# EAGLE board OpenBook PCB 2D (EAGLE 9.7.0)
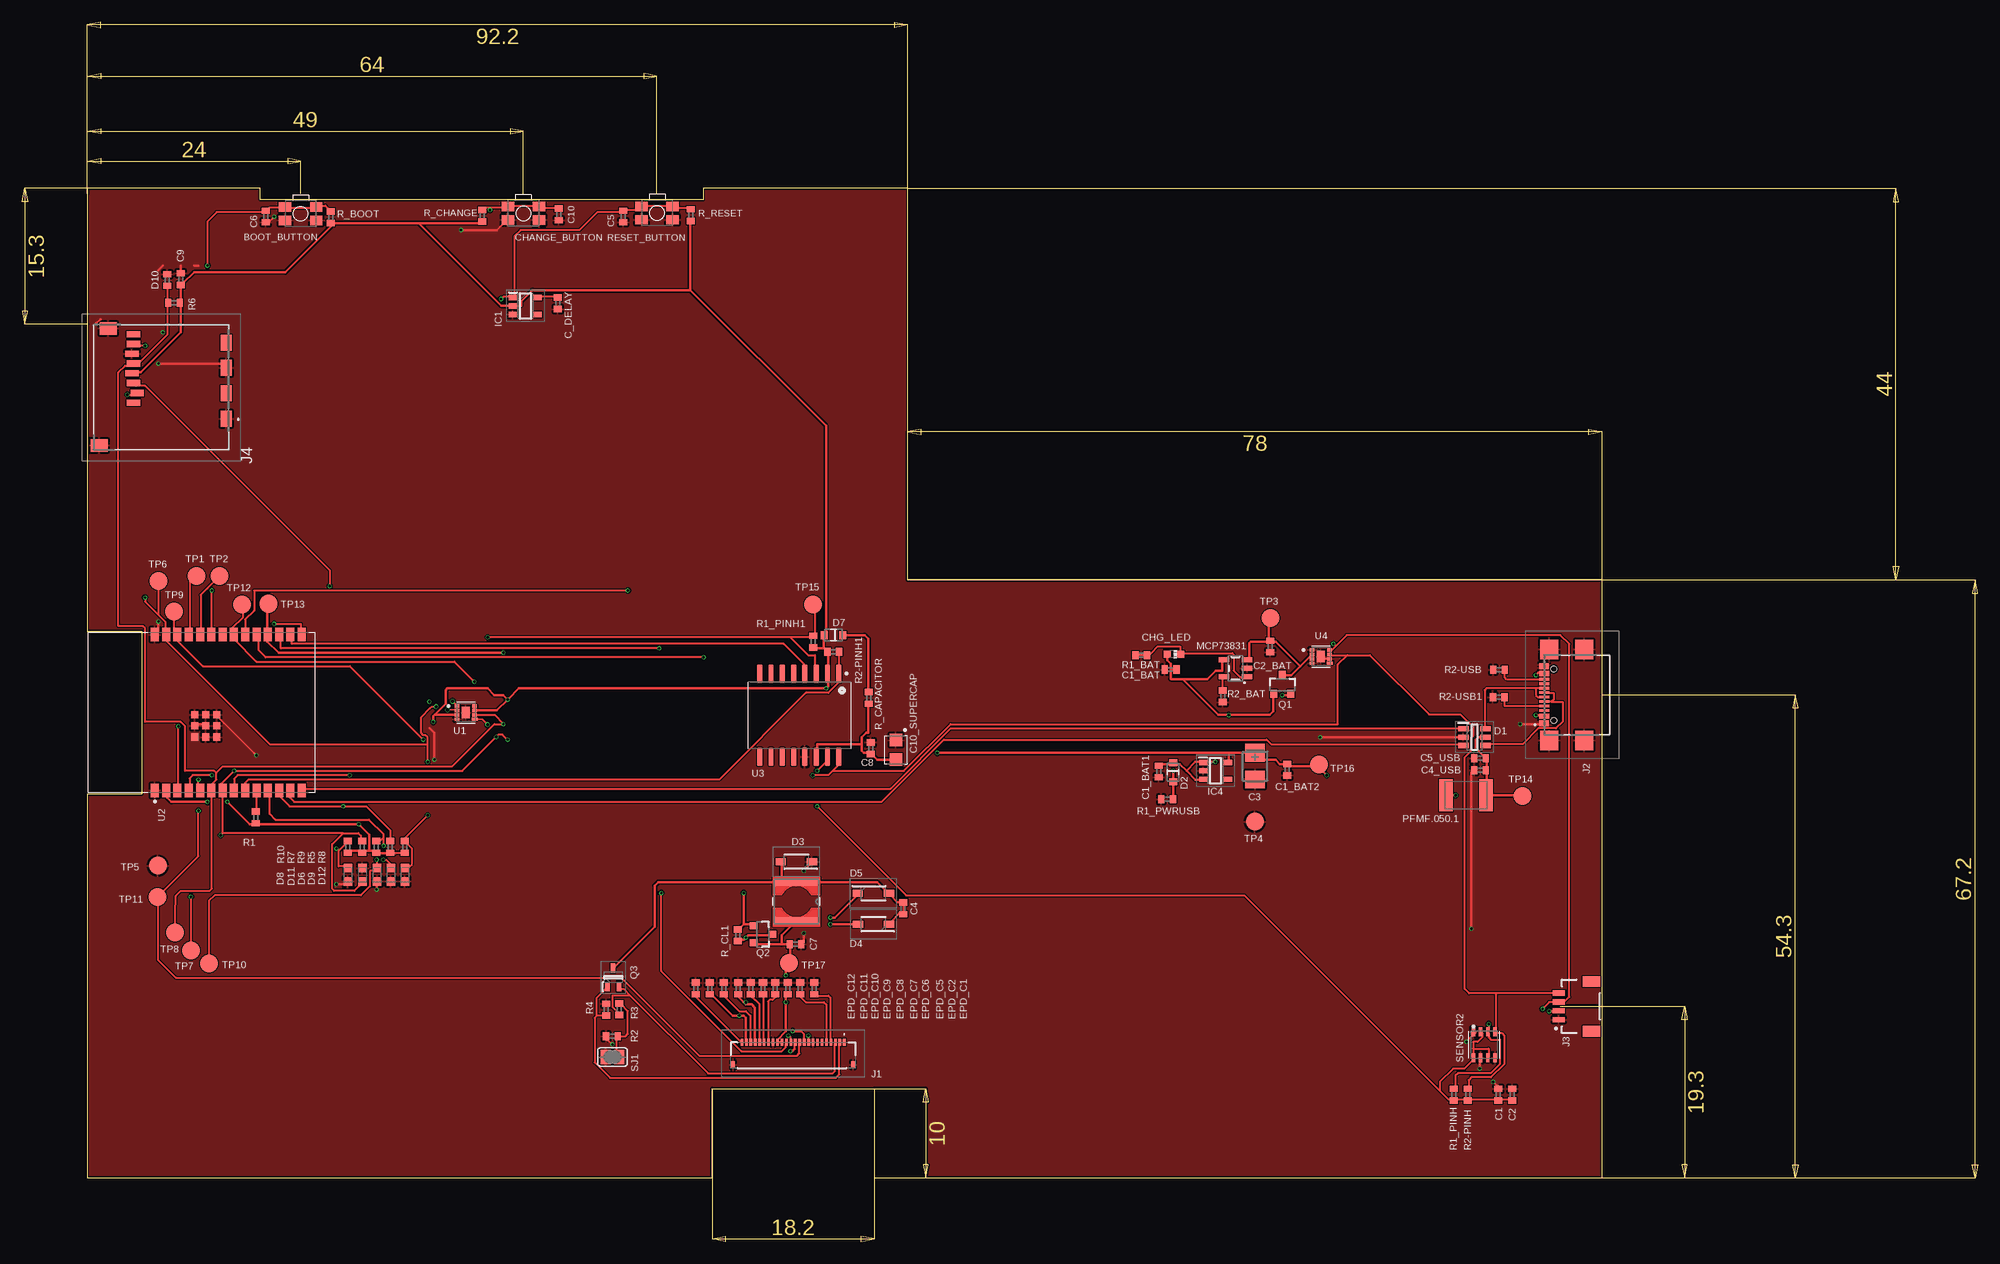
[diagram p0: board, top side]
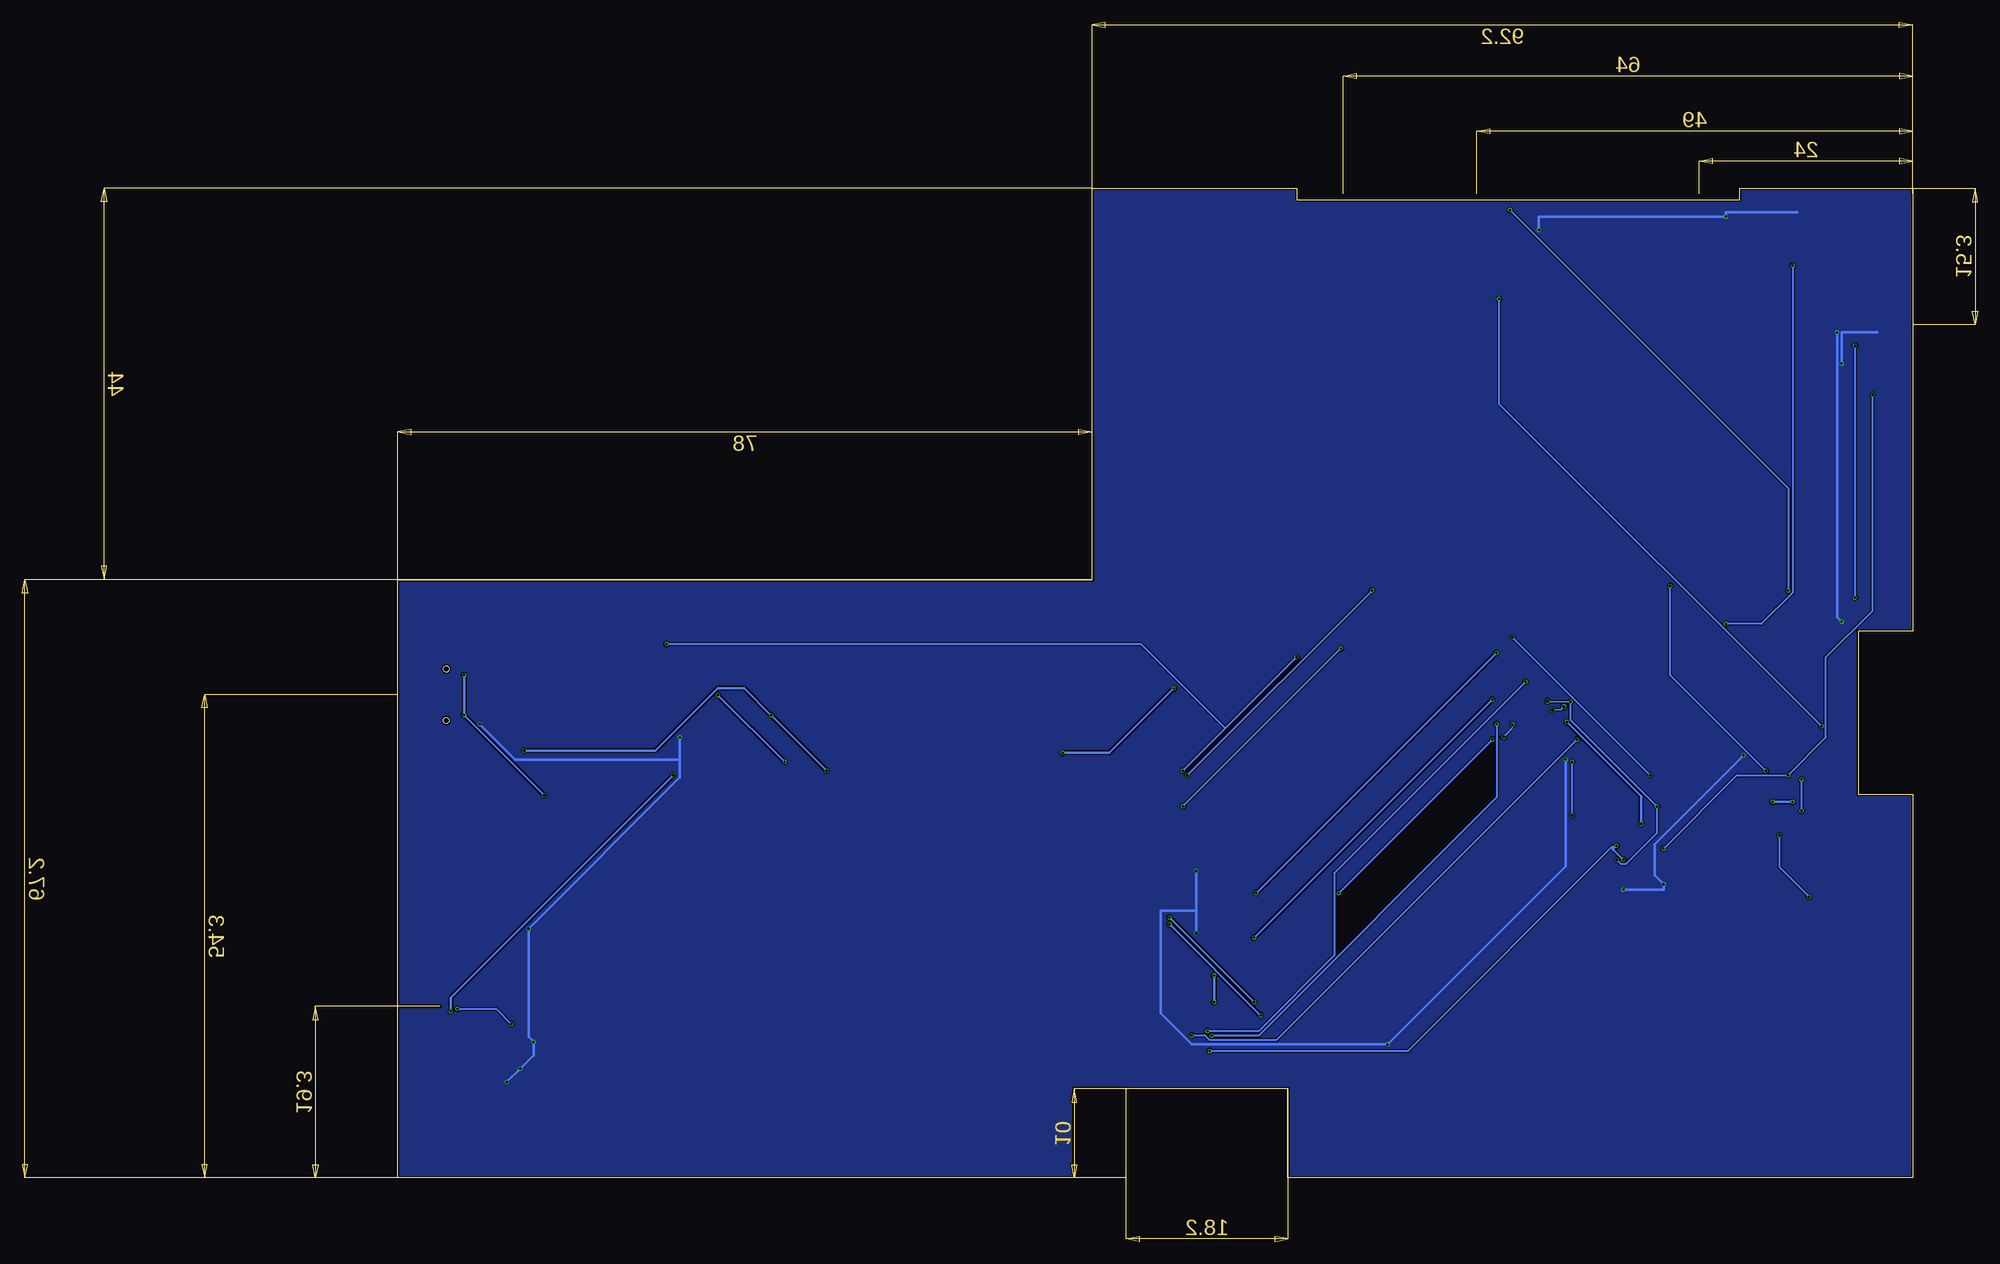
[diagram p1: board, bottom side, seen from below]

Size 170.2 x 111.2 mm. Coordinates in mm from the lower left corner, seen from the top.
Outline: 0,0 70.2,0 70.2,10 88.4,10 88.4,0 170.2,0 170.2,67.2 92.2,67.2 92.2,111.2 69.2,111.2 69.2,109.9 19.45,109.9 19.45,111.2 0,111.2 0,61.45 6.15,61.45 6.15,43.1 0,43.1 0,0
Copper layers (1*16): Top 0.035mm / dielectric 1.6mm / Bottom 0.035mm
Design rules "jlcpcb-2layers": minimum track width 0.15mm, minimum drill 0.3mm, track to track 5mil, track to pad 5mil, pad to pad 5mil, via to via 5mil, smd to smd 5mil, copper to edge 0.2mm, drill to drill 6mil, minimum pad ring 10mil, minimum via ring 3mil, stop-mask expansion 4mil, vias tented up to drill 0mil, thermal gap 10mil
Net classes: 2 POWER: width 0.3 mm

## Footprints (pad centres in the part's own frame; a part is rotated, then mirrored left to right if it is on the bottom)
MYBUTTON = smd 1.4 x 1.05: 1 1.75,0.75; 2 -1.75,0.75; 3 -1.75,-0.75; 4 1.75,-0.75
ESP32_WROVER_EAGLE-LTSPICE_C0402 = smd 0.7 x 0.9: 1 -0.65,0; 2 0.65,0
RCL_CT3528 = smd 2 x 2.2: + -1.5,0; - 1.5,0
CAPCP3225X100N = smd 1.4 x 1.4: 1 -1.1,0; 2 1.1,0
ADAFRUIT_CHIP-LED0603 = smd 0.8 x 0.8: A 0,-0.75; C 0,0.75
SOT95P280X145-6N = smd 1.2 x 0.6: 1 -1.25,0.95; 2 -1.25,0; 3 -1.25,-0.95; 4 1.25,-0.95; 5 1.25,0; 6 1.25,0.95
ESP32_WROVER_AVX---SD0805S020S1R0_AVX_SD0805S020S1R0_0 = smd 0.8 x 0.9: 1 -1.05,0; 2 1.05,0
SOD3716X135N = smd 1.15 x 0.8: 1 -1.75,0; 2 1.75,0
DIOC1608X36N = smd 0.97 x 0.94: 1 -0.75,0; 2 0.75,0
SOT95P280X125-5N = smd 0.9 x 0.6: 1 -1.4,0.95; 2 -1.4,0; 3 -1.4,-0.95; 4 1.4,-0.95; 5 1.4,0.95
SOT95P280X120-5N = smd 0.9 x 0.6: 1 -1.4,0.95; 2 -1.4,0; 3 -1.4,-0.95; 4 1.4,-0.95; 5 1.4,0.95
FH34SRJ24S05SH99 = smd 0.3 x 0.8: 1 5.75,1.45; 2 5.25,1.45; 3 4.75,1.45; 4 4.25,1.45; 5 3.75,1.45; 6 3.25,1.45; 7 2.75,1.45; 8 2.25,1.45; 9 1.75,1.45; 10 1.25,1.45; 11 0.75,1.45; 12 0.25,1.45; 13 -0.25,1.45; 14 -0.75,1.45; 15 -1.25,1.45; 16 -1.75,1.45; 17 -2.25,1.45; 18 -2.75,1.45; 19 -3.25,1.45; 20 -3.75,1.45; 21 -4.25,1.45; 22 -4.75,1.45; 23 -5.25,1.45; 24 -5.75,1.45 | smd 0.4 x 0.8: MP1 6.75,-1.05; MP2 -6.75,-1.05
SAMACSYS_PARTS_USB4110GFA = smd 0.35 x 1.05: A1 -3.35,3.678; A12 3.4,3.678; B1 3.05,3.678; B12 -3.03,3.678 | smd 0.3 x 1.15: A4 -2.55,3.678; A5 -1.25,3.678; A6 -0.25,3.678; A7 0.25,3.678; A8 1.25,3.678; A9 2.55,3.678; B4 2.25,3.678; B5 1.75,3.678; B6 0.75,3.678; B7 -0.75,3.678; B8 -1.75,3.678; B9 -2.25,3.678 | smd 2.18 x 2: MP1 -5.11,-0.827; MP2 5.11,-0.827; MP3 -5.11,3.103; MP4 5.11,3.103 | hole 0.65: -2.89,2.603; 2.89,2.603
JST04_1MM_RA = smd 0.6 x 1.35: 1 -1.5,0; 2 -0.5,0; 3 0.5,0; 4 1.5,0 | smd 1.2 x 2: NC1 2.8,-3.675; NC2 -2.8,-3.675
112ATAARR03ATTEND = smd 1.8 x 1.2: G1 10.6,10.4; G2 4.9,10.4; S1 7.75,10.4; S2 2.05,10.4 | smd 1.4 x 1.9: G3 13.6,-3.85; G4 0.45,-2.85 | smd 0.7 x 1.5: P1 8.8,0; P2 7.7,0.4; P3 6.6,0; P4 5.5,-0.2; P5 4.4,0; P6 3.3,-0.2; P7 2.2,0; P8 1.1,0
IND_4828-WE-TPC_WRE = smd 0.8 x 4.7: 1 -2.159,0; 2 2.159,0
ESP32_WROVER_SPARKFUN-IC-POWER_SOT23-5 = smd 0.55 x 1.2: 1 -0.95,-1.3; 2 0,-1.3; 3 0.95,-1.3; 4 0.95,1.3; 5 -0.95,1.3
ESP32C6_VARISTOR_CT/CN1812 = smd 1.5 x 3.6: 1 -2.25,0; 2 2.25,0
ESP32_WROVER_SPARKFUN-DISCRETESEMI_SOT23-3 = smd 0.8 x 0.9: 1 -0.95,-1; 2 0.95,-1; 3 0,1.1
SOT65P210X110-3N = smd 1.05 x 0.5: 1 -1.05,0.65; 2 -1.05,-0.65; 3 1.05,0
ESP32_WROVER_EAGLE-LTSPICE_R0402 = smd 0.7 x 0.9: 1 -0.65,0; 2 0.65,0
ESP32_WROVER_BME680_PSON80P300X300X100-8N = smd 1.016 x 0.5: 1 1.458,1.2; 2 1.458,0.4; 3 1.458,-0.4; 4 1.458,-1.2; 5 -1.458,-1.22; 6 -1.458,-0.4; 7 -1.458,0.4; 8 -1.458,1.2
SJ = smd 1.168 x 1.6: 1 -0.762,0; 2 0.762,0
TP20R = smd 2 x 2: TP 0,0
SON50P200X200X80-9N = smd 0.6 x 0.35: 1 -0.985,0.75; 2 -0.985,0.25; 3 -0.985,-0.25; 4 -0.985,-0.75; 6 0.985,-0.25; 7 0.985,0.25; 8 0.985,0.75 | smd 0.76 x 0.27: 5 0.985,-0.75 | smd 0.9 x 1.3: 9 0,0
ESP32-C6-WROOM-1-N8 = smd 1.5 x 0.9: 1 -8.75,5.26; 2 -8.75,3.99; 3 -8.75,2.72; 4 -8.75,1.45; 5 -8.75,0.18; 6 -8.75,-1.09; 7 -8.75,-2.36; 8 -8.75,-3.63; 9 -8.75,-4.9; 10 -8.75,-6.17; 11 -8.75,-7.44; 12 -8.75,-8.71; 13 -8.75,-9.98; 14 -8.75,-11.25; 15 8.75,-11.25; 16 8.75,-9.98; 17 8.75,-8.71; 18 8.75,-7.44; 19 8.75,-6.17; 20 8.75,-4.9; 21 8.75,-3.63; 22 8.75,-2.36; 23 8.75,-1.09; 24 8.75,0.18; 25 8.75,1.45; 26 8.75,2.72; 27 8.75,3.99; 28 8.75,5.26 | smd 0.8 x 0.8: 29_1 -2.755,0.79; 29_2 -1.505,0.79; 29_3 -0.255,0.79; 29_4 -2.755,-0.46; 29_5 -1.505,-0.46; 29_6 -0.255,-0.46; 29_7 -2.755,-1.71; 29_8 -1.505,-1.71; 29_9 -0.255,-1.71
SOIC127P1032X265-16N = smd 2.05 x 0.59: 1 -4.655,4.445; 2 -4.655,3.175; 3 -4.655,1.905; 4 -4.655,0.635; 5 -4.655,-0.635; 6 -4.655,-1.905; 7 -4.655,-3.175; 8 -4.655,-4.445; 9 4.655,-4.445; 10 4.655,-3.175; 11 4.655,-1.905; 12 4.655,-0.635; 13 4.655,0.635; 14 4.655,1.905; 15 4.655,3.175; 16 4.655,4.445

## Placement (x,y rotation side)
BOOT_BUTTON  BUTTON_CUSYOMV1  [MYBUTTON]  23.98,108.33 180 top
C1  100nF  [ESP32_WROVER_EAGLE-LTSPICE_C0402]  158.51,9.36 90 top
C1_BAT  4.7uF  [ESP32_WROVER_EAGLE-LTSPICE_C0402]  121.71,57.12 180 top
C1_BAT1  4.7uF  [ESP32_WROVER_EAGLE-LTSPICE_C0402]  120.4,45.67 270 top
C1_BAT2  4.7uF  [ESP32_WROVER_EAGLE-LTSPICE_C0402]  134.79,45.87 270 top
C2  100nF  [ESP32_WROVER_EAGLE-LTSPICE_C0402]  160.09,9.36 90 top
C2_BAT  4.7uF  [ESP32_WROVER_EAGLE-LTSPICE_C0402]  132.91,59.7 270 top
C3  100uF TANT  [RCL_CT3528]  131.21,46.27 270 top
C4  4.7uF/25V  [ESP32_WROVER_EAGLE-LTSPICE_C0402]  91.7,30.29 270 top
C4_USB  100nF  [ESP32_WROVER_EAGLE-LTSPICE_C0402]  156.48,45.82 180 top
C5  1uF  [ESP32_WROVER_EAGLE-LTSPICE_C0402]  60.22,108.02 270 top
C5_USB  4.7uF  [ESP32_WROVER_EAGLE-LTSPICE_C0402]  156.48,47.15 180 top
C6  100nF  [ESP32_WROVER_EAGLE-LTSPICE_C0402]  20.07,108.03 270 top
C7  10uF  [ESP32_WROVER_EAGLE-LTSPICE_C0402]  79.56,26.26 0 top
C8  100nF  [ESP32_WROVER_EAGLE-LTSPICE_C0402]  88.01,48.28 90 top
C9  100nF  [ESP32_WROVER_EAGLE-LTSPICE_C0402]  10.53,100.98 90 top
C10  100nF  [ESP32_WROVER_EAGLE-LTSPICE_C0402]  52.96,108.26 270 top
C10_SUPERCAP  CPH3225A  [CAPCP3225X100N]  90.86,48.09 270 top
C_DELAY  100nF  [ESP32_WROVER_EAGLE-LTSPICE_C0402]  52.85,98.27 270 top
CHANGE_BUTTON  BUTTON_CUSYOMV1  [MYBUTTON]  49.01,108.38 180 top
CHG_LED  [ADAFRUIT_CHIP-LED0603]  122.08,58.84 270 top
D1  USBLC6-2SC6Y  [SOT95P280X145-6N]  155.85,49.52 0 top
D2  ESP32_WROVER_AVX---SD0805S020S1R0_AVX_SD0805S020S1R0_0_0AVX_SD0805S020S1R0_0_0  [ESP32_WROVER_AVX---SD0805S020S1R0_AVX_SD0805S020S1R0_0]  121.99,45.58 270 top
D3  MBR0530  [SOD3716X135N]  79.67,35.53 180 top
D4  MBR0530  [SOD3716X135N]  88.33,28.52 180 top
D5  MBR0530  [SOD3716X135N]  88.31,31.98 0 top
D6  PGB1010603MR  [DIOC1608X36N]  32.56,34.07 90 top
D7  ESP32_WROVER_AVX---SD0805S020S1R0_AVX_SD0805S020S1R0_0_0AVX_SD0805S020S1R0_0_0  [ESP32_WROVER_AVX---SD0805S020S1R0_AVX_SD0805S020S1R0_0]  83.84,60.98 180 top
D8  PGB1010603MR  [DIOC1608X36N]  29.29,34.07 90 top
D9  PGB1010603MR  [DIOC1608X36N]  34.13,34.07 90 top
D10  [ESP32_WROVER_EAGLE-LTSPICE_C0402]  8.99,100.88 270 top
D11  PGB1010603MR  [DIOC1608X36N]  30.92,34.07 270 top
D12  PGB1010603MR  [DIOC1608X36N]  35.69,34.07 90 top
EPD_C1  1uF/50V  [ESP32_WROVER_EAGLE-LTSPICE_C0402]  81.69,21.3 90 top
EPD_C2  1uF/50V  [ESP32_WROVER_EAGLE-LTSPICE_C0402]  80.11,21.3 270 top
EPD_C5  0.1uF/50V  [ESP32_WROVER_EAGLE-LTSPICE_C0402]  78.72,21.3 90 top
EPD_C6  1uF/50V  [ESP32_WROVER_EAGLE-LTSPICE_C0402]  77.32,21.3 90 top
EPD_C7  1uF/50V  [ESP32_WROVER_EAGLE-LTSPICE_C0402]  75.92,21.3 90 top
EPD_C8  1uF/50V  [ESP32_WROVER_EAGLE-LTSPICE_C0402]  74.52,21.3 90 top
EPD_C9  1uF/50V  [ESP32_WROVER_EAGLE-LTSPICE_C0402]  73.11,21.3 90 top
EPD_C10  1uF/50V  [ESP32_WROVER_EAGLE-LTSPICE_C0402]  71.53,21.3 90 top
EPD_C11  1uF/50V  [ESP32_WROVER_EAGLE-LTSPICE_C0402]  69.96,21.3 90 top
EPD_C12  1uF/50V  [ESP32_WROVER_EAGLE-LTSPICE_C0402]  68.38,21.3 90 top
IC1  BD5229G-TR  [SOT95P280X125-5N]  49.23,97.97 0 top
IC4  XC6220A331MR-G  [SOT95P280X120-5N]  126.76,45.74 0 top
J1  FH34SRJ-24S-0.5SH_99_  [FH34SRJ24S05SH99]  79.3,13.79 0 top
J2  SAMACSYS_PARTS_USB4110-GF-A  [SAMACSYS_PARTS_USB4110GFA]  167.36,54.28 90 top
J3  QWIIC_RIGHT_ANGLE  [JST04_1MM_RA]  165.32,19.28 90 top
J4  112A-TAAR-R03_ATTEND112ATA  [112ATAARR03ATTEND]  5.22,95.9 270 top
L1  68uH  [IND_4828-WE-TPC_WRE]  79.67,31.05 270 top
MCP73831  ESP32_WROVER_SPARKFUN-IC-POWER_MCP73831  [ESP32_WROVER_SPARKFUN-IC-POWER_SOT23-5]  129,57.25 90 top
PFMF.050.1  ESP32C6_VARISTOR  [ESP32C6_VARISTOR_CT/CN1812]  154.89,43 0 top
Q1  20V/4.2A/52mΩ/1.4W  [ESP32_WROVER_SPARKFUN-DISCRETESEMI_SOT23-3]  134.26,55.41 0 top
Q2  20V/4.2A/52mΩ/1.4W  [ESP32_WROVER_SPARKFUN-DISCRETESEMI_SOT23-3]  75.88,27.37 270 top
Q3  SI1308EDL-T1-GE3  [SOT65P210X110-3N]  59.09,22.53 90 top
R1  10K  [ESP32_WROVER_EAGLE-LTSPICE_R0402]  18.93,40.51 270 top
R1_BAT  200  [ESP32_WROVER_EAGLE-LTSPICE_R0402]  118.42,58.74 180 top
R1_PINH  10K  [ESP32_WROVER_EAGLE-LTSPICE_R0402]  153.51,9.36 270 top
R1_PINH1  10K  [ESP32_WROVER_EAGLE-LTSPICE_R0402]  81.56,60.26 270 top
R1_PWRUSB  100K  [ESP32_WROVER_EAGLE-LTSPICE_R0402]  121.32,42.54 0 top
R2  2.2  [ESP32_WROVER_EAGLE-LTSPICE_R0402]  58.94,15.91 0 top
R2-PINH  10K  [ESP32_WROVER_EAGLE-LTSPICE_R0402]  155.09,9.36 270 top
R2-PINH1  10K  [ESP32_WROVER_EAGLE-LTSPICE_R0402]  83.82,59.13 180 top
R2-USB  5k1  [ESP32_WROVER_EAGLE-LTSPICE_R0402]  158.6,57.08 180 top
R2-USB1  5k1  [ESP32_WROVER_EAGLE-LTSPICE_R0402]  158.57,54.02 0 top
R2_BAT  2K  [ESP32_WROVER_EAGLE-LTSPICE_R0402]  127.56,54.12 90 top
R3  0.47  [ESP32_WROVER_EAGLE-LTSPICE_R0402]  59.79,18.96 270 top
R4  10K  [ESP32_WROVER_EAGLE-LTSPICE_R0402]  58.3,18.91 270 top
R5  10K  [ESP32_WROVER_EAGLE-LTSPICE_R0402]  34.06,37.2 270 top
R6  10K  [ESP32_WROVER_EAGLE-LTSPICE_R0402]  9.74,98.33 0 top
R7  10K  [ESP32_WROVER_EAGLE-LTSPICE_R0402]  30.88,37.2 270 top
R8  10K  [ESP32_WROVER_EAGLE-LTSPICE_R0402]  35.65,37.2 270 top
R9  10K  [ESP32_WROVER_EAGLE-LTSPICE_R0402]  32.47,37.2 270 top
R10  10K  [ESP32_WROVER_EAGLE-LTSPICE_R0402]  29.29,37.2 270 top
R_BOOT  10K  [ESP32_WROVER_EAGLE-LTSPICE_C0402]  27.38,107.92 270 top
R_CAPACITOR  15  [ESP32_WROVER_EAGLE-LTSPICE_R0402]  87.81,53.94 90 top
R_CHANGE  10K  [ESP32_WROVER_EAGLE-LTSPICE_R0402]  44.39,108.11 270 top
R_CL1  10K  [ESP32_WROVER_EAGLE-LTSPICE_R0402]  73.08,27.27 270 top
R_RESET  10K  [ESP32_WROVER_EAGLE-LTSPICE_R0402]  67.78,108.17 270 top
RESET_BUTTON  BUTTON_CUSYOMV1  [MYBUTTON]  64.03,108.41 180 top
SENSOR2  ESP32_WROVER_BME680_BME680  [ESP32_WROVER_BME680_PSON80P300X300X100-8N]  156.94,14.96 90 top
SJ1  [SJ]  59.01,13.59 0 top
TP1  TPTP20R  [TP20R]  12.27,67.61 0 top
TP2  TPTP20R  [TP20R]  14.88,67.61 0 top
TP3  TPTP20R  [TP20R]  132.94,62.89 0 top
TP4  TPTP20R  [TP20R]  131.17,40.04 0 top
TP5  TPTP20R  [TP20R]  7.94,35.09 0 top
TP6  TPTP20R  [TP20R]  8.01,67.06 0 top
TP7  TPTP20R  [TP20R]  11.64,25.57 0 top
TP8  TPTP20R  [TP20R]  9.84,27.57 0 top
TP9  TPTP20R  [TP20R]  9.77,63.66 0 top
TP10  TPTP20R  [TP20R]  13.69,24.1 0 top
TP11  TPTP20R  [TP20R]  7.89,31.56 0 top
TP12  TPTP20R  [TP20R]  17.38,64.41 0 top
TP13  TPTP20R  [TP20R]  20.34,64.51 0 top
TP14  TPTP20R  [TP20R]  161.24,42.94 0 top
TP15  TPTP20R  [TP20R]  81.55,64.42 0 top
TP16  TPTP20R  [TP20R]  138.39,46.47 0 top
TP17  TPTP20R  [TP20R]  78.84,24.15 0 top
U1  W25Q512JVEIQ  [SON50P200X200X80-9N]  42.54,52.28 0 top
U2  ESP32-C6-WROOM-1-N8  [ESP32-C6-WROOM-1-N8]  12.85,52.29 90 top
U3  DS3231SN#  [SOIC127P1032X265-16N]  79.99,51.97 270 top
U4  MAX17048G+T10  [SON50P200X200X80-9N]  138.6,58.57 0 top

## Library data of the parts
BOOT_BUTTON CHANGE_BUTTON CHG_LED J2 J4 PFMF.050.1 RESET_BUTTON SJ1 TP1-TP17 U2 = DeskAssistant v19 v1
C1 C1_BAT C1_BAT1 C1_BAT2 C2 C2_BAT C4 C4_USB C5 C5_USB C6-C10 C_DELAY D10 EPD_C1 EPD_C2 EPD_C5-EPD_C12 R_BOOT = DeskAssistant v19 v1; SPICEMODEL: NONE; SPICEPREFIX: C
C3 = DeskAssistant v19 v1; SPICEPREFIX: C
C10_SUPERCAP = DeskAssistant v19 v1; AVAILABILITY: Not in stock; CHECK_PRICES: https://www.snapeda.com/parts/CPH3225A/Seiko+Instruments/view-part/?ref=eda; DESCRIPTION: 11 mF (EDLC) Supercapacitor 3.3 V 1210 (3225 Metric) - -; MF: Seiko Instruments; MP: CPH3225A; PACKAGE: 1210 Seiko; PRICE: None; PURCHASE-URL: https://www.snapeda.com/api/url_track_click_mouser/?unipart_id=562593&manufacturer=Seiko Instruments&part_name=CPH3225A&search_term=None; SNAPEDA_LINK: https://www.snapeda.com/parts/CPH3225A/Seiko+Instruments/view-part/?ref=snap
D1 = DeskAssistant v19 v1; AVAILABILITY: In Stock; CHECK_PRICES: https://www.snapeda.com/parts/USBLC6-2SC6Y/STMicroelectronics/view-part/?ref=eda; DESCRIPTION: 17V Clamp 5A (8/20µs) Ipp Tvs Diode Surface Mount SOT-23-6; MF: STMicroelectronics; MP: USBLC6-2SC6Y; PACKAGE: SOT-23-6 STMicroelectronics; PRICE: None; SNAPEDA_LINK: https://www.snapeda.com/parts/USBLC6-2SC6Y/STMicroelectronics/view-part/?ref=snap
D2 D7 = DeskAssistant v19 v1; CENTROID_NOT_SPECIFIED: No; DATASHEET: http://datasheets.avx.com/schottky.pdf; DIGIKEY_DESCRIPTION: DIODE SCHOTTKY 20V 1A 0805; DIGIKEY_PART_NUMBER: 478-7800-1-ND; LEAD_FREE: yes; MF: AVX; MOUSER_PART_NUMBER: 581-SD0805S020S1R0; PACKAGE: 0805 (2012 metric); PREFIX: D; ROHS: yes; TEMPERATURE_RANGE_HIGH: +125°C; TEMPERATURE_RANGE_LOW: -55°C
D3-D5 = DeskAssistant v19 v1; AVAILABILITY: In Stock; CHECK_PRICES: https://www.snapeda.com/parts/MBR0530/Onsemi/view-part/?ref=eda; DESCRIPTION: Diode Schottky 30 V 500mA Surface Mount SOD-123; MF: ON Semiconductor; MP: MBR0530; PACKAGE: SOD-123-2 ON Semiconductor; PRICE: None; PURCHASE-URL: https://www.snapeda.com/api/url_track_click_mouser/?unipart_id=179458&manufacturer=ON Semiconductor&part_name=MBR0530&search_term=None; SNAPEDA_LINK: https://www.snapeda.com/parts/MBR0530/Onsemi/view-part/?ref=snap
D6 D8 D9 D11 D12 = DeskAssistant v19 v1; AVAILABILITY: In Stock; CHECK_PRICES: https://www.snapeda.com/parts/PGB1010603MR/Littelfuse/view-part/?ref=eda; DESCRIPTION: 150V (Typ) Clamp - Ipp Tvs Diode Surface Mount 0603 (1608 Metric); MF: Littelfuse Inc.; MP: PGB1010603MR; PACKAGE: 0603 Littelfuse Inc.; PRICE: None; PURCHASE-URL: https://www.snapeda.com/api/url_track_click_mouser/?unipart_id=5659453&manufacturer=Littelfuse Inc.&part_name=PGB1010603MR&search_term=None; SNAPEDA_LINK: https://www.snapeda.com/parts/PGB1010603MR/Littelfuse/view-part/?ref=snap
IC1 = DeskAssistant v19 v1; DESCRIPTION: Voltage Detector with Adjustable Delay Time: CMOS processes are utilized to develop high precision, low current consumption CMOS reset ICs that allow arbitrary setting of the delay time. The extensive lineup includes both Nch Open Drain and CMOS output types in a wide range of detection voltages (from 2.3V to 6.0V, in 0.1V steps), enabling selection of the ideal solution based on customer requirements. In addition, the entire series is of course both lead-free and RoHS-compliant.; HEIGHT: 1.25mm; MANUFACTURER_NAME: ROHM Semiconductor; MANUFACTURER_PART_NUMBER: BD5229G-TR; MOUSER_PART_NUMBER: 755-BD5229G-TR; MOUSER_PRICE-STOCK: https://www.mouser.co.uk/ProductDetail/ROHM-Semiconductor/BD5229G-TR?qs=4kLU8WoGk0vvnhrrYwdszw%3D%3D
IC4 = DeskAssistant v19 v1; DESCRIPTION: LDO Voltage Regulators; HEIGHT: 1.2mm; MANUFACTURER_NAME: Torex; MANUFACTURER_PART_NUMBER: XC6220A331MR-G; MOUSER_PART_NUMBER: 865-XC6220A331MR-G; MOUSER_PRICE-STOCK: https://www.mouser.co.uk/ProductDetail/Torex-Semiconductor/XC6220A331MR-G?qs=AsjdqWjXhJ8ZSWznL1J0gg%3D%3D
J1 = DeskAssistant v19 v1; DESCRIPTION: 24 Position FFC, FPC Connector Contacts, Top and Bottom 0.020" (0.50mm) Surface Mount, Right Angle; HEIGHT: 1.1mm; MANUFACTURER_NAME: Hirose; MANUFACTURER_PART_NUMBER: FH34SRJ-24S-0.5SH(99); MOUSER_PART_NUMBER: 798-FH34SRJ24S05SH99; MOUSER_PRICE-STOCK: https://www.mouser.co.uk/ProductDetail/Hirose-Connector/FH34SRJ-24S-0.5SH99?qs=vcbW%252B4%252BSTIpKBl5ap9J8Fw%3D%3D
J3 = DeskAssistant v19 v1; PROD_ID: CONN-13694
L1 = DeskAssistant v19 v1; COPYRIGHT: Copyright (C) 2024 Ultra Librarian. All rights reserved.; MANUFACTURER_PART_NUMBER: 744043680; MFR_NAME: Wurth Electronics
MCP73831 = DeskAssistant v19 v1; PROD_ID: IC-09995
Q1 Q2 = DeskAssistant v19 v1; PROD_ID: TRAN-14388
Q3 = DeskAssistant v19 v1; AVAILABILITY: In Stock; CHECK_PRICES: https://www.snapeda.com/parts/SI1308EDL-T1-GE3/Vishay+Siliconix/view-part/?ref=eda; DESCRIPTION: Si1308EDL-T1-GE3 N-channel MOSFET Transistor, 1.5 A, 30 V, 3-Pin SC-70 | Siliconix / Vishay SI1308EDL-T1-GE3; MF: Vishay Siliconix; MP: SI1308EDL-T1-GE3; PACKAGE: SOT-323 Vishay Semiconductor; PRICE: None; PURCHASE-URL: https://www.snapeda.com/api/url_track_click_mouser/?unipart_id=274603&manufacturer=Vishay Siliconix&part_name=SI1308EDL-T1-GE3&search_term=None; SNAPEDA_LINK: https://www.snapeda.com/parts/SI1308EDL-T1-GE3/Vishay+Siliconix/view-part/?ref=snap
R1 R1_BAT R1_PINH R1_PINH1 R1_PWRUSB R2 R2-PINH R2-PINH1 R2-USB R2-USB1 R2_BAT R3-R10 R_CAPACITOR R_CHANGE R_CL1 R_RESET = DeskAssistant v19 v1; SPICEMODEL: NONE; SPICEPREFIX: R
SENSOR2 = DeskAssistant v19 v1; AVAILABILITY: Unavailable; DESCRIPTION: Integrated Environmental Unit; MF: Bosch Sensortec; MP: BME680; PACKAGE: LGA-8 Bosch Tools; PRICE: None
U1 = DeskAssistant v19 v1; AVAILABILITY: In Stock; CHECK_PRICES: https://www.snapeda.com/parts/W25Q512JVEIQ/Winbond+Electronics/view-part/?ref=eda; DESCRIPTION: FLASH - NOR Memory IC 512Mb (64M x 8) SPI - Quad I/O 133 MHz 8-WSON (8x6); MF: Winbond Electronics; MP: W25Q512JVEIQ; PACKAGE: Package; PRICE: None; SNAPEDA_LINK: https://www.snapeda.com/parts/W25Q512JVEIQ/Winbond+Electronics/view-part/?ref=snap
U3 = DeskAssistant v19 v1; AVAILABILITY: In Stock; CHECK_PRICES: https://www.snapeda.com/parts/DS3231SN%23/Analog+Devices/view-part/?ref=eda; DESCRIPTION: Extremely Accurate I²C-Integrated RTC/TCXO/Crystal; MF: Analog Devices; MP: DS3231SN#; PACKAGE: SOIC-16 Maxim; PRICE: None; PURCHASE-URL: https://www.snapeda.com/api/url_track_click_mouser/?unipart_id=99048&manufacturer=Analog Devices&part_name=DS3231SN#&search_term=None; SNAPEDA_LINK: https://www.snapeda.com/parts/DS3231SN%23/Analog+Devices/view-part/?ref=snap
U4 = DeskAssistant v19 v1; AVAILABILITY: In Stock; CHECK_PRICES: https://www.snapeda.com/parts/MAX17048G+T10/Analog+Devices/view-part/?ref=eda; DESCRIPTION: 3µA 1-Cell/2-Cell Fuel Gauge with ModelGauge; MF: Analog Devices; MP: MAX17048G+T10; PACKAGE: TDFN-8 Maxim; PRICE: None; PURCHASE-URL: https://www.snapeda.com/api/url_track_click_mouser/?unipart_id=329239&manufacturer=Analog Devices&part_name=MAX17048G+T10&search_term=None; SNAPEDA_LINK: https://www.snapeda.com/parts/MAX17048G+T10/Analog+Devices/view-part/?ref=snap

## Nets
3V3 [POWER]: C1_BAT2.1 C3.+ C9.1 D7.2 IC1.2 IC4.5 J3.2 J4.P4 Q2.3 R1.2 R1_PINH1.2 R2-PINH1.2 R5.2 R6.2 R7.2 R8.2 R9.2 R10.2 R_BOOT.2 R_CHANGE.2 R_CL1.2 R_RESET.2 TP16.TP U1.3 U1.7 U1.8 U2.2 U3.2
32KHZ: R2-PINH1.1 U2.9 U3.1
A5_J2: J2.A5 R2-USB1.2
B5_J2: J2.B5 R2-USB.1
C_DELAY: C_DELAY.1 IC1.5
CE_VIN [POWER]: C1_BAT1.1 D2.1 IC4.1 IC4.3 Q1.2
CHG_STATUS: CHG_LED.C MCP73831.1 R1_BAT.1 R1_BAT.2
D7_R_CAP [POWER]: D7.1 R_CAPACITOR.2
DN: D1.4 J2.A7 J2.B7
DP: D1.6 J2.A6 J2.B6
EPD_3V3 [POWER]: C7.1 EPD_C5.1 J1.15 J1.16 L1.2 Q2.2 TP17.TP
EPD_3V3_C [POWER]: Q2.1 R_CL1.1 TP13.TP U2.18
EPD_BUSY: J1.9 TP9.TP U2.26
EPD_CS: D6.2 J1.12 R9.1 TP10.TP U2.11
EPD_DC: J1.11 TP11.TP U2.5
EPD_RST: J1.10 TP12.TP U2.21
FLASH_CS: D9.2 R5.1 U1.1 U2.12
GDR: J1.2 Q3.1 R4.2
GND [POWER]: BOOT_BUTTON.1 BOOT_BUTTON.2 C1.2 C1_BAT1.2 C1_BAT2.2 C1_BAT.2 C2.2 C2_BAT.2 C3.- C4_USB.2 C5.2 C5_USB.2 C6.2 C7.2 C8.2 C9.2 C10.2 C10_SUPERCAP.1 C_DELAY.2 CHANGE_BUTTON.1 CHANGE_BUTTON.2 D1.2 D3.1 D6.1 D8.1 D9.1 D10.1 D11.1 D12.1 EPD_C1.2 EPD_C2.1 EPD_C5.2 EPD_C6.2 EPD_C7.2 EPD_C8.2 EPD_C9.2 EPD_C10.2 EPD_C11.2 EPD_C12.2 IC1.3 IC4.2 J1.8 J1.17 J1.MP1 J1.MP2 J2.A1 J2.A12 J2.B1 J2.B12 J2.MP1 J2.MP2 J2.MP3 J2.MP4 J3.1 J4.G1 J4.G2 J4.G3 J4.G4 J4.P6 MCP73831.2 R1_PWRUSB.1 R2-USB1.1 R2-USB.2 R2.1 R2_BAT.1 R4.1 RESET_BUTTON.1 RESET_BUTTON.2 SENSOR2.1 SENSOR2.5 SENSOR2.7 SJ1.1 TP4.TP TP5.TP U1.4 U1.9 U2.1 U2.28 U2.29_1 U2.29_2 U2.29_3 U2.29_4 U2.29_5 U2.29_6 U2.29_7 U2.29_8 U2.29_9 U3.13 U4.1 U4.4 U4.6 U4.9
GPIO8: R1.1 U2.10
I2C_PW: C1.1 C2.1 R1_PINH.2 R2-PINH.2 SENSOR2.2 SENSOR2.6 SENSOR2.8 U2.17
INT_RTC: R1_PINH1.1 TP15.TP U2.8 U3.3
IO/BOOT: BOOT_BUTTON.3 BOOT_BUTTON.4 C6.1 R_BOOT.1 U2.15
IO/CHANGE: C10.1 CHANGE_BUTTON.3 CHANGE_BUTTON.4 R_CHANGE.1 U2.23
MISO: D12.2 J4.P7 R8.1 TP6.TP U1.2 U2.27
MOSI: D11.2 J1.14 J4.P3 R7.1 TP7.TP U1.5 U2.7
N$12: EPD_C1.1 J1.4
N$13: EPD_C2.2 J1.5
N$14: EPD_C6.1 J1.18
N$15: EPD_C7.1 J1.19
N$16: EPD_C8.1 J1.20
N$19: EPD_C10.1 J1.22
N$20: EPD_C12.1 J1.24
PREVGH [POWER]: D5.1 EPD_C9.1 J1.21
PREVGL [POWER]: D4.2 EPD_C11.1 J1.23
PROG: MCP73831.5 R2_BAT.2
RESE: J1.3 Q3.2 R3.2
RESE': R2.2 R3.1 SJ1.2
RESET: C5.1 IC1.1 R_RESET.1 RESET_BUTTON.3 RESET_BUTTON.4 U2.3
RTC_RST: U2.16 U3.4
RX: TP2.TP U2.24
SCK: D10.2 J1.13 J4.P5 R6.1 TP8.TP U1.6 U2.6
SCL: J3.4 R2-PINH.1 SENSOR2.4 U2.20 U3.16 U4.7
SDA: J3.3 R1_PINH.1 SENSOR2.3 U2.19 U3.15 U4.8
SRC [POWER]: C4.1 C4.2 D3.2 D4.1 D5.2 L1.1 Q3.3
SS_SD: D8.2 J4.P2 R10.1 U2.4
TX: TP1.TP U2.25
USB_D+: D1.1 U2.14
USB_D-: D1.3 U2.13
VBAT [POWER]: C2_BAT.1 MCP73831.3 Q1.3 TP3.TP U4.2 U4.3
VBUS [POWER]: C1_BAT.1 C4_USB.1 C5_USB.1 CHG_LED.A D1.5 D2.2 MCP73831.4 PFMF.050.1.2 Q1.1 R1_PWRUSB.2 TP14.TP
VRTC [POWER]: C8.1 C10_SUPERCAP.2 R_CAPACITOR.1 U3.14
VUSB [POWER]: J2.A4 J2.A9 J2.B4 J2.B9 PFMF.050.1.1

## Tracks (layer width: path | path; a pad name or v marks a point on that pad's centre or on a via)
3V3  (via drill 0.3)
  Top 0.3: J4.P4 5.25,90.5 6,90.5 10.5,95 10.5,98.25 R6.2 10.5,98.5 10.5,100.25 C9.1 10.75,100.5 12,101.75 22.25,101.75 27.75,107.25 | 37.25,107.25 44.25,107.25 R_CHANGE.2 | 37.25,107.25 27.75,107.25 | 27.75,107.25 27.5,107.25 R_BOOT.2 27.75,107.25 | 37.25,107.25 46.5,98 47.75,98 IC1.2 48,98 48.75,98 48.75,98.5 50,99.75 67.75,99.75 | 67.75,99.75 67.75,107.5 R_RESET.2 | 128.25,47.75 128.25,46.75 IC4.5 | 128.25,47.75 131,47.75 C3.+ 131.25,47.75 132,47 133.5,47 134,46.5 134.75,46.5 C1_BAT2.1 135,46.5 135.25,46.25 138.25,46.25 | v164.25,18.75 165.25,18.75 J3.2 | 138.25,46.25 v139.25,45.25 | 138.25,46.25 TP16.TP | R8.2 34.58,36.47 R5.2 33.63,36.5 32.54,36.5 R9.2 32.32,36.75 31.7,36.75 | 31.7,36.75 31.7,38.55 v30.5,39.75 19,39.75 R1.2 18.75,39.75 18.25,39.75 v15.75,42.25 | 31.7,36.75 31.06,36.75 R7.2 30.5,36.75 29.59,36.75 R10.2 | v13.5,42.25 9.45,42.25 9,42.7 9,43.5 U2.2 | 82.75,59.5 83,59.25 R2-PINH1.2 83.25,59 83.25,56.75 U3.2 83.25,56.5 83.25,55.25 v83,55 48.5,55 47.37,53.87 v47.25,53.75 | 82.75,59.5 81.75,59.5 R1_PINH1.2 | 82.75,59.5 82.75,60.75 D7.2 83,61 83,84.5 67.75,99.75 | R_CL1.2 73.25,26.75 73.75,26.75 v74,27 74.25,27.25 76.75,27.25 Q2.3 | 39.03,52.03 40.25,53.25 40.25,54.8 40.45,55 45,55 45.75,54.25 46.75,54.25 v47.25,53.75 | v95.5,47.75 128.25,47.75 | U1.8 U1.7 46.03,52.53 v47.25,53.75 | U1.3 39.03,52.03 | 39.03,52.03 38.87,51.87 v38.87,51.23
  Bottom 0.3: v164.25,18.75 164.25,20.25 v139.25,45.25 | v15.75,42.25 v13.5,42.25 | v47.25,53.75 v74,27 | v95.5,47.75 90.25,47.75 v83,55 | v30.5,39.75 30.5,42.86 v38.87,51.23
32KHZ
  Top 0.2: R2-PINH1.1 84.5,59 84.5,56.75 U3.1 84.25,56.5 84.25,55.5 83.25,54.5 80.75,54.5 71,44.75 18.1,44.75 17.75,44.4 U2.9
A5_J2
  Top 0.2: R2-USB1.2 159.25,54 159.25,53 163.5,53 J2.A5
B5_J2
  Top 0.2: R2-USB.1 159.25,56.25 159.5,56 163.5,56 J2.B5
C_DELAY
  Top 0.2: IC1.5 50.75,99 52.75,99 C_DELAY.1
CE_VIN  (via drill 0.3)
  Top 0.3: 123.5,45.75 122.75,46.5 122,46.5 D2.1 121.75,46.5 120.5,46.5 C1_BAT1.1 | 123.5,45.75 124.5,44.75 125.25,44.75 IC4.3 | 123.5,45.75 124.5,46.75 125.25,46.75 IC4.1 125.5,46.75 v126.75,46.75 | v134.25,54.25 135,54.25 Q1.2
  Bottom 0.3: v126.75,46.75 v134.25,54.25
CHG_STATUS
  Top 0.2: R1_BAT.2 117.79,58.71 119.04,58.71 R1_BAT.1 119.29,58.96 119.54,58.96 120.29,59.71 122.79,59.71 122.79,58.96 CHG_LED.C 123.04,58.96 128.64,58.96 128.79,58.81 128.79,57.01 129.54,56.26 130.29,56.26 MCP73831.1
D7_R_CAP
  Top 0.3: R_CAPACITOR.2 87.75,54.75 87.75,60.6 87.35,61 85,61 D7.1
DN
  Top 0.2: 164.5,53.5 163.75,53.5 J2.B7 | 164.5,53.5 164.75,53.75 164.75,54.5 163.75,54.5 J2.A7 | 164.5,53.5 165.75,53.5 165.75,51.25 165,50.5 163,50.5 161.25,48.75 157.25,48.75 D1.4
DP
  Top 0.2: 162.75,55 162.75,54.25 163,54 163.5,54 J2.A6 | 162.75,55 163.5,55 J2.B6 | 162.75,55 157.2,55 157,54.8 157,50.5 D1.6
EPD_3V3  (via drill 0.3)
  Top 0.3: 77.5,15.25 78,15.25 J1.15 | 77.5,15.25 77.5,15.5 78.5,16.5 v78.5,19.75 78.5,20.5 EPD_C5.1 | 77.5,15.25 J1.16 | 78,26.25 78.75,26.25 C7.1 79,26.25 79,24.25 TP17.TP 78.75,24 78.5,24 v78.5,22.75 | 78,26.25 75,26.25 Q2.2 | 78,26.25 78,27.25 79.5,28.75 L1.2
  Bottom 0.3: v78.5,22.75 v78.5,19.75
EPD_3V3_C  (via drill 0.3)
  Top 0.3: 73.75,28.5 73.25,28 R_CL1.1 | 73.75,28.5 74.75,28.5 Q2.1 | TP13.TP 20.25,64.5 20.25,61.25 U2.18 20.25,61 20.25,60.25 21.5,59 v46.75,59 | v73.75,32 73.75,28.5
  Bottom 0.3: v46.75,59 v73.75,32
EPD_BUSY  (via drill 0.3)
  Top 0.2: v81,16 81,15.25 J1.9 | v37.75,49.25 29.5,57.5 13,57.5 10.25,60.25 10.25,61 U2.26 10,61.25 9.75,61.25 9.75,63.5 TP9.TP
  Bottom 0.2: v81,16 79.5,16 79,15.5 71.5,15.5 v37.75,49.25
EPD_CS  (via drill 0.3)
  Top 0.2: v79,14.25 79.25,14.25 79.5,14.5 79.5,15 J1.12 | v32.5,35.75 32.5,34.95 D6.2 32.55,34.8 32.25,34.5 31.75,34.5 31.75,32.75 30.75,31.75 14.3,31.75 13.68,31.12 13.68,24.12 TP10.TP | U2.11 20.5,43.5 20.5,40.9 21.15,40.25 31.65,40.25 33.3,38.6 33.3,38.3 | v33.3,37.3 33.3,38.3 | R9.1 32.85,37.85 33.3,38.3
  Bottom 0.2: v79,14.25 56.75,14.25 33.75,37.25 33.75,37 | v33.3,37.3 33.75,36.85 33.75,37 | 33.75,37 v32.5,35.75
EPD_DC  (via drill 0.3)
  Top 0.2: J1.11 80,15 80,14 79.75,13.75 68.75,13.75 60,22.5 9.95,22.5 7.95,24.5 7.95,31.51 TP11.TP 12.5,36.17 v12.5,41.25 | v12.5,44.75 12.5,43.75 U2.5
  Bottom 0.2: v12.5,41.25 v12.5,44.75
EPD_RST  (via drill 0.3)
  Top 0.2: v79.25,16.5 80.2,16.5 80.5,16.2 80.5,15.25 J1.10 | v43.5,55.75 41.25,58 19,58 16.5,60.5 16.5,61 U2.21 16.25,61.25 16.25,61.75 17.5,63 17.5,64.25 TP12.TP
  Bottom 0.2: v79.25,16.5 73.5,16.5 65,25 65,34.25 v43.5,55.75
FLASH_CS  (via drill 0.3, 0.35)
  Top 0.15: U1.1 v41.03,53.55
  Top 0.2: U2.12 21.75,43.5 21.75,42.75 22.75,41.75 v28.75,41.75 31.35,41.75 34.06,39.04 R5.1 | v33.25,35.75 33.6,35.75 34,35.35 34,35.05 D9.2
  Bottom 0.15: v41.03,53.55 40.98,53.5 v38.45,53.5
  Bottom 0.2: v38.45,53.5 38.45,51.45 v28.75,41.75 28.75,38.75 32.25,35.25 32.75,35.25 v33.25,35.75
GDR
  Top 0.2: 57.25,18.25 57,18 57,13 58.75,11.25 84.1,11.25 84.5,11.65 84.5,15 J1.2 | 57.25,18.25 58.25,18.25 R4.2 | 57.25,18.25 57.25,20.25 58.25,21.25 Q3.1
GND  (via drill 0.3)
  Top 0.3: U2.29_5 13.25,51 12.25,51 U2.29_2 | v156.45,12.29 156.45,13.29 SENSOR2.7 | v157.95,10.79 158.45,10.29 C1.2 | v154.95,15.29 155.95,16.29 SENSOR2.1 | v155.5,28 155.5,45.5 C4_USB.2 | v138.5,49.5 154.5,49.5 D1.2 | v161,51 163.5,51 J2.A1 | v80.5,27.5 80.5,26.5 C7.2 | v80.5,34.5 81.5,35.5 D3.1 | v32.5,32.4 32.5,32.95 D6.1 | v28,33 29.04,33 D8.1 | v19,47.5 14.5,52 U2.29_9 | v8,62.5 8,61.5 U2.28 | 12,102.5 12.5,102.5 | 9,101.5 D10.1 | 10.5,102.5 10.5,101.5 C9.2 | 8,102 8.5,102.5 | 1,96 1.5,96.5 | v21,108 20.5,107.5 C6.2 | v8,91.5 15,91.5 15.5,91 J4.G2 | v42,106.5 46,106.5 47,107.5 CHANGE_BUTTON.1 | v59,15 58.5,15.5 R2.1 | v39,47 39,50 38.5,50.5 | U4.6 138.85,58.32 U4.9
  Bottom 0.3: v157.95,10.79 v156.45,12.29 154.95,13.79 v154.95,15.29 155.5,15.84 v155.5,28 138.5,45 138.5,47 | v138.5,49.5 138.5,47 | 138.5,47 157,47 v161,51 | v80.5,34.5 80.5,30 | 80.5,30 v80.5,27.5 | v32.5,32.4 28,32.4 v28,33 29,34 29,37.5 v19,47.5 | v8,62.5 8.5,63 v8.5,95 | 13,108.5 21,108.5 v21,108 42,108 v42,106.5 | 4,95 8,95 v8,91.5 | 80.5,30 84.5,30 84.5,18.5 81,15 v59,15 39,35 v39,47
  pour Top: -33.77,-27.97 197.72,-27.97 197.72,136.77 -33.77,136.77
  pour Bottom: 172.01,-27.99 172.03,-27.97 197.72,-27.97 197.72,137.32 -34.22,137.32 -34.22,-28.27 171.72,-28.27
GPIO8
  Top 0.2: R1.1 19,41.25 19,43.5 U2.10
I2C_PW  (via drill 0.3)
  Top 0.2: 155.7,14.54 155.7,15.29 156.2,15.29 156.7,15.79 156.7,16.29 SENSOR2.2 | 155.7,14.54 155.7,13.54 SENSOR2.8 155.7,13.29 154.7,12.29 153.45,12.29 151.96,10.79 151.96,9.79 | 155.7,14.54 157.45,14.54 157.45,13.54 SENSOR2.6 | C2.1 159.95,8.79 158.7,8.79 C1.1 158.45,8.79 155.2,8.79 R2-PINH.2 154.95,8.79 153.7,8.79 R1_PINH.2 153.45,8.79 152.95,8.79 151.96,9.79 | v64.25,59.5 21.75,59.5 21.75,61 U2.17 | v82,41.75 92,31.75 129.99,31.75 151.96,9.79
  Bottom 0.2: v82,41.75 v64.25,59.5
INT_RTC  (via drill 0.3)
  Top 0.2: TP15.TP 81.75,64.25 81.75,61 R1_PINH1.1 81.5,60.75 79,60.75 | v29.5,45.25 16.9,45.25 16.5,44.85 16.5,43.75 U2.8 | 79,60.75 v45,60.75 | 79,60.75 81,58.75 81.75,58.75 81.75,56.75 U3.3
  Bottom 0.2: v45,60.75 v29.5,45.25
IO/BOOT  (via drill 0.3)
  Top 0.2: R_BOOT.1 27.25,108.75 26.75,109.25 25.75,109.25 BOOT_BUTTON.3 25.5,109 22.25,109 BOOT_BUTTON.4 22,109 20.5,109 20.25,108.75 C6.1 20,108.5 14.55,108.5 13.5,107.45 v13.5,102.5 | v21,62.25 24,62.25 24,61.25 U2.15
  Bottom 0.2: v21,62.25 17,62.25 13.5,65.75 v13.5,102.5
IO/CHANGE  (via drill 0.3)
  Top 0.2: C10.1 52.75,109 51,109 CHANGE_BUTTON.3 50.75,109.25 47.5,109.25 CHANGE_BUTTON.4 47.25,109 45.25,109 | 45.25,109 44.5,109 R_CHANGE.1 | v14,66 14,61.25 U2.23 | 45.25,109 v45.25,108.75
  Bottom 0.2: v14,66 14,77.5 v45.25,108.75
MISO  (via drill 0.3, 0.35)
  Top 0.15: 38.5,52.75 38.7,52.95 v39.2,52.95 | U1.2 41.51,52.58 v40.47,52.58
  Top 0.2: D12.2 35.74,35 36.25,35 36.5,35.25 36.5,37 R8.1 35.52,38.02 v38.25,40.75 | 38.5,52.75 37.5,51.75 37.5,50 37.75,49.75 38,49.75 38.25,49.5 38.25,48.75 | v38.25,46.75 38.25,48.75 | v6.5,93.5 5.25,93.5 J4.P7 | v6.5,65.2 6.5,64.75 8.01,63.24 | 8.01,63.24 TP6.TP | 8.01,63.24 8.75,62.5 8.75,61.25 U2.27 9,61 9,60.25 20.5,48.75 38.25,48.75
  Bottom 0.15: v40.47,52.58 39.57,52.58 v39.2,52.95
  Bottom 0.2: v38.25,40.75 v38.25,46.75 | v6.5,93.5 v6.5,65.2
MOSI  (via drill 0.3, 0.35)
  Top 0.15: U1.5 44.37,51.53 v44.98,50.92
  Top 0.2: v64.5,32 64.5,23.25 73.5,14.25 78.05,14.25 78.5,14.7 78.5,15 J1.14 | v47.25,49.25 47.2,49.25 46.65,49.8 46.2,49.8 v45.95,49.55 42.15,45.75 v16.5,45.75 15,44.25 15,43.75 U2.7 15.25,43.5 15.25,38.75 | 28.75,38.75 30.45,38.75 30.75,38.45 30.75,37.88 R7.1 | 28.75,38.75 27.5,37.5 27.5,32.5 27.75,32.25 30,32.25 31,33.25 D11.2 | 28.75,38.75 15.25,38.75 | v27.25,66.5 27.25,68.25 6.5,89 5.5,89 5.25,89.25 J4.P3 | 15.25,38.75 v15,38.5 | v11.65,31.6 TP7.TP
  Bottom 0.15: v45.95,49.55 44.98,50.52 v44.98,50.92
  Bottom 0.2: v47.25,49.25 v64.5,32 | v27.25,66.5 27.25,56.5 v16.5,45.75 | v15,38.5 15,34.95 v11.65,31.6
N$12
  Top 0.2: J1.4 83.5,15.25 83.5,20.25 83.25,20.5 81.75,20.5 EPD_C1.1
N$13
  Top 0.2: J1.5 83,15.25 83,19.5 82.75,19.75 80.75,19.75 80,20.5 EPD_C2.2
N$14
  Top 0.2: J1.18 76.5,15.25 76.5,19.85 76.65,20 77,20 77.5,20.5 EPD_C6.1
N$15
  Top 0.2: J1.19 76,15.25 76,20.5 EPD_C7.1
N$16
  Top 0.2: J1.20 75.5,15.25 75.5,19.55 75.05,20 75,20 74.5,20.5 EPD_C8.1
N$19
  Top 0.2: J1.22 74.5,15.25 74.5,18.25 74,18.75 73.25,18.75 71.5,20.5 EPD_C10.1
N$20
  Top 0.2: J1.24 73.5,15.25 68.25,20.5 EPD_C12.1
PREVGH  (via drill 0.3)
  Top 0.3: 73.75,19.75 73,20.5 EPD_C9.1 | 73.75,19.75 74,19.5 74.65,19.5 75,19.15 75,15.25 J1.21 | v83.5,29.25 84,29.25 86.5,31.75 D5.1 | 73.75,19.75 v74,19.75
  Bottom 0.3: v83.5,29.25 v74,19.75
PREVGL  (via drill 0.3)
  Top 0.3: J1.23 74,15.25 74,18 73.75,18.25 v73.25,18.25 72.5,18.25 70.25,20.5 70,20.5 EPD_C11.1 | v83.5,28.5 86.5,28.5 D4.2
  Bottom 0.3: v73.25,18.25 v83.5,28.5
PROG
  Top 0.2: R2_BAT.2 127.54,54.83 127.54,56.26 MCP73831.5
RESE
  Top 0.2: 61,20.5 60.25,21.25 59.75,21.25 Q3.2 | 61,20.5 69.75,11.75 83.75,11.75 84,12 84,15 J1.3 | 61,20.5 59,20.5 59,19.25 59.75,18.5 R3.2
RESE'
  Top 0.2: SJ1.2 59.75,13.75 59.5,13.75 59.5,15.75 R2.2 59.66,15.95 60.5,15.95 60.75,16.2 60.75,18.75 60,19.5 R3.1
RESET  (via drill 0.3)
  Top 0.2: R_RESET.1 67.75,109 66,109 RESET_BUTTON.3 65.75,109.25 62.5,109.25 RESET_BUTTON.4 62.25,109 62,108.75 60.25,108.75 C5.1 60,108.5 57.3,108.5 55.3,106.5 48.7,106.5 48,105.8 48,99 IC1.1 47.75,99 46.75,99 v46.5,98.75 | v10.25,50.75 10.25,43.75 U2.3
  Bottom 0.2: v10.25,50.75 46.5,87 v46.5,98.75
RTC_RST
  Top 0.2: U2.16 23,61 23,60 78.25,60 80.5,57.75 80.5,56.75 U3.4
RX
  Top 0.2: U2.24 12.75,61.25 12.75,65.5 13.5,66.25 14.75,67.5 TP2.TP
SCK  (via drill 0.3)
  Top 0.2: v78.75,16 78.85,16 79,15.85 79,15.25 J1.13 | D10.2 9,100 9,98.5 R6.1 9,98.25 9,94.75 6,91.75 5.5,91.75 5.25,91.5 J4.P5 5,91.5 4.75,91.25 4.25,91.25 3.5,90.5 3.5,62 6.25,62 6.5,61.75 6.5,51.25 10.5,51.25 11,50.75 11,45.75 14.25,45.75 14.5,45.5 | TP8.TP 9.95,31.7 10.51,32.25 13.75,32.25 14,32.5 14,43.5 U2.6 14,43.75 14,44.25 14.5,44.75 14.5,45.5 | 14.5,45.5 15.25,46.25 41,46.25 45.75,51 v46.75,51 46.75,51.04 45.76,52.03 U1.6
  Bottom 0.2: v78.75,16 73.5,16 46.75,42.75 v46.75,51
SCL  (via drill 0.3)
  Top 0.2: R2-PINH.1 155.2,10.04 155.2,10.99 155.5,11.29 157.7,11.29 159.2,12.79 159.2,15.99 158.9,16.29 158.2,16.29 SENSOR2.4 158.25,16.64 158.25,20.75 | 158.25,20.75 155.25,20.75 154.75,21.25 154.75,47.25 155.5,48 155.5,49.5 155.75,49.75 155.75,50.61 154.27,52.09 150.75,52.09 144.09,58.75 141.56,58.75 | 158.25,20.75 165.25,20.75 J3.4 | U4.7 139.75,58.75 141.56,58.75 | U2.20 17.75,62.75 18.75,63.75 18.75,66 v60.75,66 | v81.5,45.25 83.25,45.25 83.75,45.75 | 83.75,45.75 84.25,46.25 84.25,47.25 U3.16 | 83.75,45.75 91.75,45.75 97,51 140.5,51 140.5,57.69 141.56,58.75
  Bottom 0.2: v81.5,45.25 v60.75,66
SDA  (via drill 0.3)
  Top 0.2: v69.25,58.5 20.05,58.5 19.25,59.3 19.25,61 U2.19 | v82,45.75 83,46.75 83,47.25 U3.15 | R1_PINH.1 153.7,10.04 153.7,11.49 154,11.79 157.7,11.79 158.7,12.79 158.7,15.54 157.7,15.54 157.45,15.79 157.45,16.29 SENSOR2.3 157.45,16.54 v157.45,17.29 | 140.25,59.75 141.5,61 165.5,61 166.5,60 166.5,20.35 165.9,19.75 165.5,19.75 J3.3 165.25,19.75 164.25,19.75 v163.5,19 | 140.25,59.75 139.75,59.25 U4.8 | 140.25,59.75 v140,60
  Bottom 0.2: v82,45.75 77.25,50.5 | 77.25,50.5 v69.25,58.5 | v163.5,19 159.16,19 v157.45,17.29 | 77.25,50.5 86.75,60 v140,60
SRC
  Top 0.3: D4.1 90.25,28.75 91.25,29.75 91.5,29.75 C4.2 91.75,29.75 91.75,30.75 C4.1 91.5,31 91,31 90.25,31.75 D5.2 90,32 88.75,33.25 79.75,33.25 L1.1 | 78,33.25 64.15,33.25 63.75,32.85 63.75,28.25 59.25,23.75 Q3.3 | 78,33.25 79.5,33.25 L1.1 | 78,33.25 78,35.5 D3.2 | 78,33.25 L1.1
SS_SD  (via drill 0.3)
  Top 0.2: 28.25,36.75 29.27,37.77 R10.1 | 28.25,36.75 28.25,35 29.23,35 D8.2 | v14,45.25 11.85,45.25 11.5,44.9 11.5,43.75 U2.4 | 28.25,36.75 v28,37 | v4.5,88 5.5,88 J4.P2
  Bottom 0.2: v28,37 19.75,45.25 v14,45.25 9.75,49.5 9.75,58.5 4.5,63.75 v4.5,88
TX
  Top 0.2: U2.25 11.5,61.25 11.5,67.5 12.25,67.5 TP1.TP
USB_D+
  Top 0.2: D1.1 154.5,50.5 97,50.5 90.25,43.75 24.25,43.75 U2.14
USB_D-
  Top 0.2: D1.3 154.5,48.75 133,48.75 132.5,49.25 96.25,49.25 89.25,42.25 23.25,42.25 22.75,42.75 22.75,43.5 U2.13
VBAT
  Top 0.3: 136.25,57.5 135.25,56.5 134.5,56.5 Q1.3 | 136.25,57.5 137.5,58.75 U4.2 U4.3 | C2_BAT.1 132.75,60.5 132.75,62.75 TP3.TP | MCP73831.3 130.54,58.26 130.54,60.06 130.73,60.25 132.75,60.25 C2_BAT.1 | 136.25,57.5 133.5,60.25 133,60.25 C2_BAT.1
VBUS  (via drill 0.3)
  Top 0.3: D1.5 157,49.5 156.25,49.5 156,49.25 v156,48 156.25,48 157,47.25 C5_USB.1 157.25,47 157.25,46 C4_USB.1 157.25,45.75 157.25,43 | 157.25,43 161,43 TP14.TP | 157.25,43 PFMF.050.1.2 | R1_PWRUSB.2 122,42.75 122,44.5 D2.2 122,44.75 v122,45.75 | 128.25,52.03 132.83,52.03 133.25,52.45 133.25,54.25 Q1.1 | 128.25,52.03 127.08,52.03 123.08,56.03 | MCP73831.4 127.54,58.01 127.54,57.01 126.79,57.01 125.81,56.03 123.08,56.03 | 128.25,52.03 v128.25,52 | CHG_LED.A 121.33,58.17 121.72,57.78 121.72,57.26 | 122.36,56.79 C1_BAT.1 121.86,57.12 121.72,57.26 | 121.72,57.26 121.72,56.07 121.76,56.03 123.08,56.03
  Bottom 0.3: v122,45.75 v128.25,52 128.28,52 131.28,55 134.25,55 141.25,48 v156,48
VRTC
  Top 0.3: C10_SUPERCAP.2 90.75,47 88.75,47 88.25,47.5 C8.1 88,47.75 87.25,47.75 87,48 87,48.75 | 87,48.75 87,49.5 87.5,50 87.75,50 87.75,53.25 R_CAPACITOR.1 | 87,48.75 82,48.75 82,47.5 U3.14
VUSB  (via drill 0.3)
  Top 0.3: J2.A4 163.75,51.75 163.75,52 J2.B9 163.5,52 v162.75,52 | J2.B4 163.75,56.5 163.75,56.75 J2.A9 163.5,56.75 163,56.75 v162.75,56.5 | PFMF.050.1.1 v153.75,43
  Bottom 0.3: v162.75,56.5 v162.75,52 v153.75,43